# Altium PCB project_buran_a01.PcbDoc
Units mm, origin at the board's own origin, x right, y up, seen from the top; angles counter-clockwise.
Board outline 100 x 50 mm, 2 copper layers (Top Layer, Bottom Layer); 22 components, 30 nets, 131 pads, 0 vias.
Unrouted connection lines stored in the file: 70.
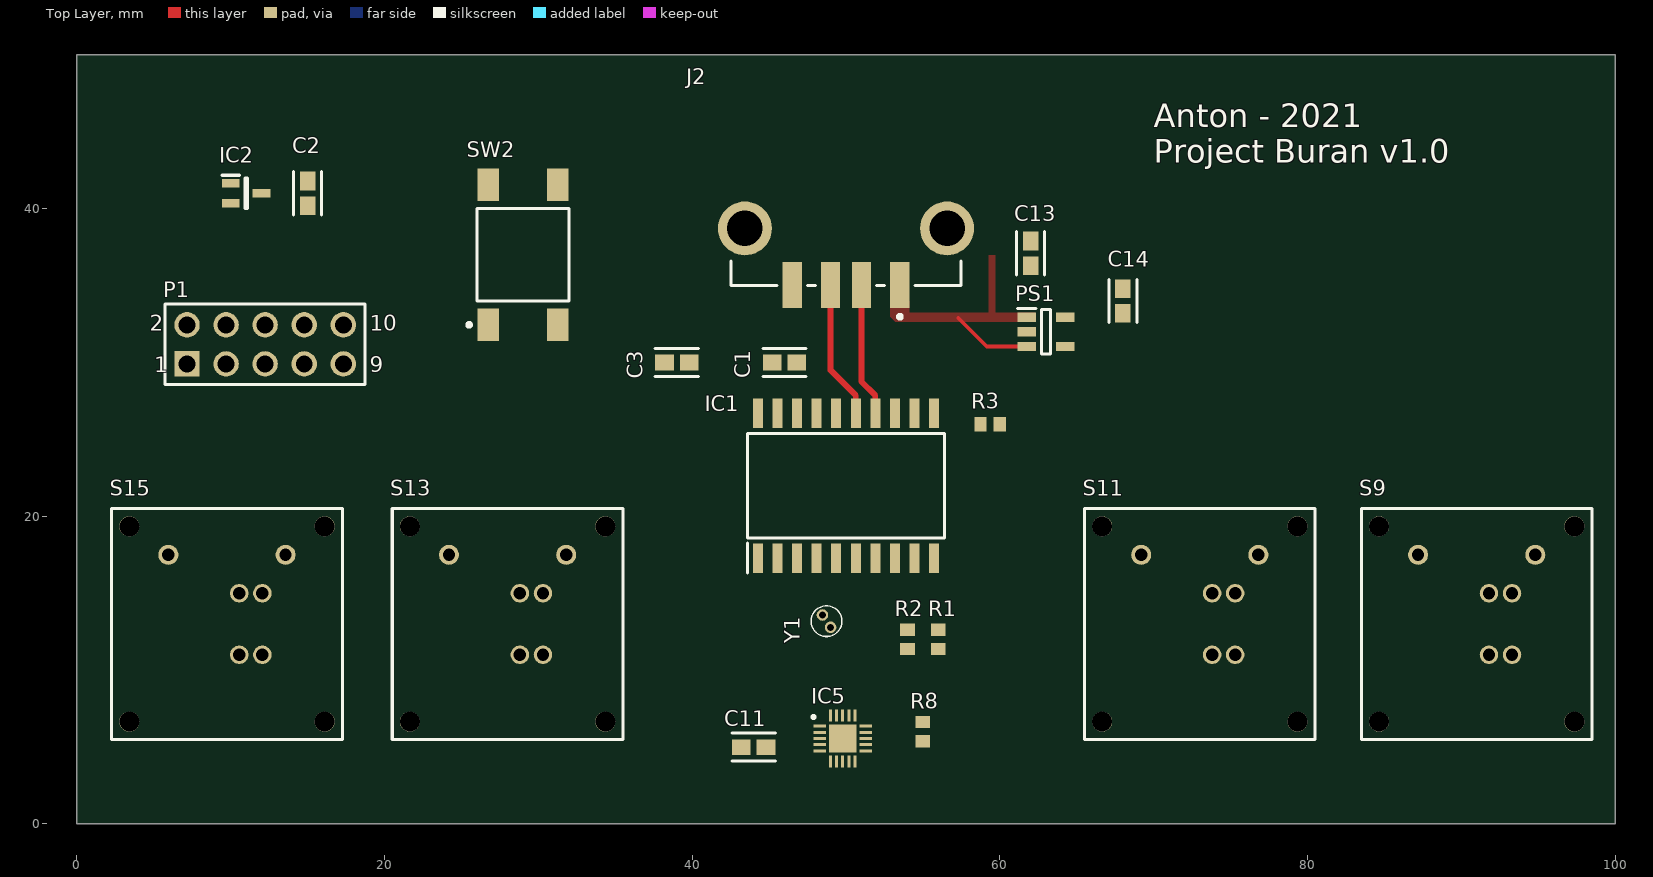
[diagram p0: Top Layer view]
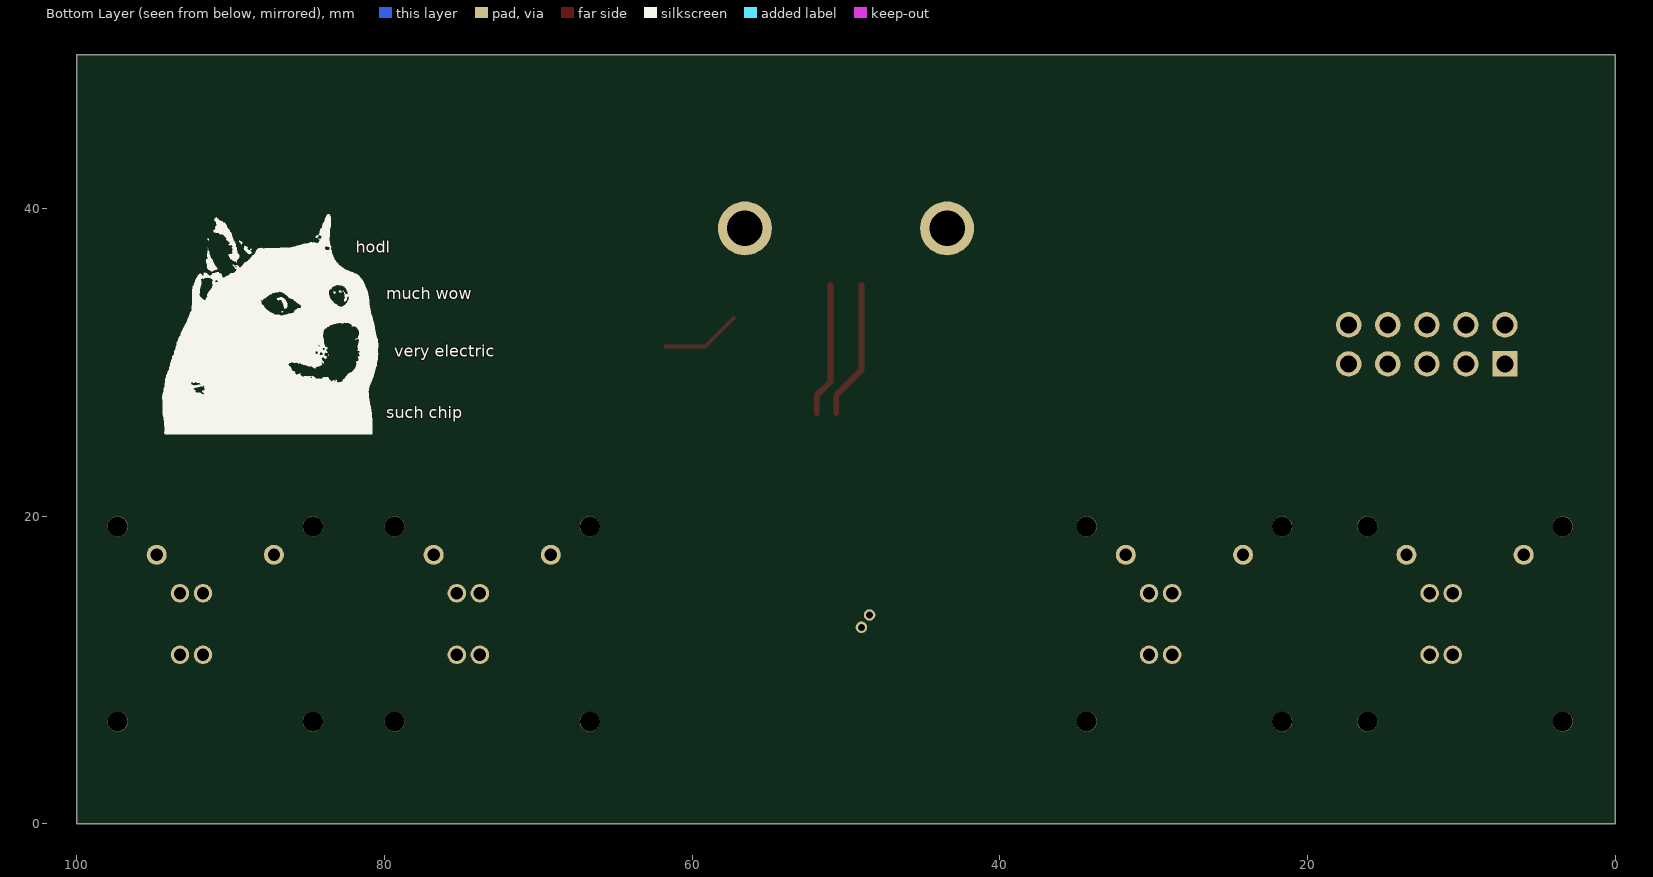
[diagram p1: Bottom Layer view, seen from below]

## Layer stack, top to bottom
Top Solder: solder mask 0.0102, Solder Resist, Dk 3.5
Top Layer: signal copper 0.0356
Dielectric 1: dielectric 0.32, FR-4, Dk 4.8
Bottom Layer: signal copper 0.0356
Bottom Solder: solder mask 0.0102, Solder Resist, Dk 3.5

## Board outline
0,0 100,0 100,50 0,50

## Design rules (kind name [scope] priority, off if disabled: settings)
Clearance [All] p1: gap=0.254 ignorepadtopadclearanceinfootprint=FALSE except(0: Arc-Hole Track-Hole SMDPad-Hole THPad-Hole Via-Hole Fill-Hole Poly-Hole Region-Hole Text-Hole)
DiffPairsRouting [All] p1: maxlimit=0.254 minlimit=0.254 mostfreqgap=0.254 toplayer_minwidth=0.381 toplayer_maxwidth=0.381 toplayer_prefwidth=0.381 bottomlayer_minwidth=0.381 bottomlayer_maxwidth=0.381 bottomlayer_prefwidth=0.381 maxuncoupledlength=12.7
PolygonConnect [All] p1: connectstyle=Direct reliefconductorwidth=0.254 reliefentries=4 polygonreliefangle="90 Angle" airgapwidth=0.254
RoutingVias [All] p1: holewidth=0.711 width=1.27 viastyle="Through Hole" minholewidth=0.711 minwidth=1.27 maxholewidth=0.711 maxwidth=1.27
SolderMaskExpansion [All] p1: expansion=0.102 istentingtop=FALSE
Width [All] p1: maxlimit=0.254 minlimit=0.254 preferedwidth=0.254
29 further rules are at their usual default settings.

## Classes and differential pairs
differential pair D: +D_P -D_N

## Components (designator, comment, footprint, x,y, rotation, side; value= is the part's Value field where it differs from the comment)
C1 "GRM188R60J106ME47D" FP-GRM188-0_1-e0_2_0_55-IPC_A 46,30 r0 top
C2 "GRM188R60J106ME47D" FP-GRM188-0_1-e0_2_0_55-IPC_A 15,41 r90 top
C3 "GRM188R60J106ME47D" FP-GRM188-0_1-e0_2_0_55-IPC_A 39,30 r180 top
C11 "GRM188R60J106ME47D" FP-GRM188-0_1-e0_2_0_55-IPC_A 44,5 r180 top
C13 "GRM188R60J106ME47D" FP-GRM188-0_1-e0_2_0_55-IPC_A 62,37.1 r90 top
C14 "GRM188R60J106ME47D" FP-GRM188-0_1-e0_2_0_55-IPC_A 68,34 r90 top
IC1 "ATSAMD11D14A-SSUT" SOIC127P1032X265-20N 50,22 r90 top
IC2 "MAX803SQ308T1G" SOT65P220X100-3N 11,41 r0 top
IC5 "LP5012RUKR" QFN40P300X300X80-21N-D 49.786,5.558 r0 top
J2 "292303-7" FP-292303-7-MFG 50,42 r270 top
P1 "61301021121" 61301021121 12.239,31.182 r0 top
PS1 "TLV75733PDBVR" SOT95P280X145-5N 63,32 r0 top
R1 "CRCW0603110RFKEA" RESC1609X50X30NL10T20 56,12 r270 top
R2 "CRCW0603110RFKEA" RESC1609X50X30NL10T20 54,12 r270 top
R3 "CRCW0603110RFKEA" RESC1609X50X30NL10T20 59.375,26 r0 top
R8 "CRCW0603110RFKEA" RESC1609X50X30NL10T20 55,6 r90 top
S9 "465M111172501" 465M111172501 91,13 r0 top
S11 "465M111172501" 465M111172501 73,13 r0 top
S13 "465M111172501" 465M111172501 28,13 r0 top
S15 "465M111172501" 465M111172501 9.756,13 r0 top
SW2 "FSM4JSMA" TECO-FSM4JSMA_V 29,37 r180 top
Y1 "AB15T-32.768KHZ" AB15T32768KHZ 48.998,12.787 r180 top

## Footprints (in the part's own frame and the unit in brackets; to place one, negate y for a bottom-side part, rotate by r counter-clockwise, add the part's x,y. Pads: shape width x height; smd on the part's side, far side on the other; paste and mask are expansions set on the pad)
465M111172501 [mm] "15x15mm THT Push Button Switch with integrated LED RGB"
  round 1.3 hole 0.8: 1(-3.81,4.5) 2(3.81,4.5)
  round 1.2 hole 0.8: L1(0.8,-2) L2(2.3,-2) L3(2.3,2) LC(0.8,2)
  round 1.3 hole 1.3 unplated: MH1(-6.35,-6.35) MH2(-6.35,6.35) MH3(6.35,6.35) MH4(6.35,-6.35)
  silkscreen extent -7.5,-7.5 7.5,7.5, body extent -7.5,-7.5 7.5,7.5, height 19.55
61301021121 [mm] "Pin Header, pitch 2.54 mm, THT, Vertical, dual row, 10p"
  rect 1.65x1.65 hole 1.1: 1(-5.08,-1.27)
  round 1.65 hole 1.1: 2(-5.08,1.27) 3(-2.54,-1.27) 4(-2.54,1.27) 5(0,-1.27) 6(0,1.27) 7(2.54,-1.27) 8(2.54,1.27) 9(5.08,-1.27) 10(5.08,1.27)
  silkscreen extent -6.5,-2.62 6.5,2.62, body extent -6.35,-2.54 6.35,2.54, height 8.59
AB15T32768KHZ [mm]
  round 0.75 hole 0.45: 1(0,0) 2(0.53,-0.8)
  silkscreen extent -0.73,-1.4 1.27,0.6, body extent -0.49,-1.15 1.01,0.35, height 5.2
FP-292303-7-MFG [mm]
  rect 3x1.25 smd paste+0 mask+0: 1(6.96,3.5) 2(6.96,1) 3(6.96,-1) 4(6.96,-3.5)
  round 3.5 hole 2.3 paste-1000 mask+0: 5(3.28,6.57) 6(3.28,-6.57)
  silkscreen extent 5.4,-7.47 9.15,7.47, body extent -7.1,-8.42 8.56,8.42, height 0.25
FP-GRM188-0_1-e0_2_0_55-IPC_A [mm]
  rect 1.208x1.012 smd paste+0 mask+0: 1(-0.802,0) 2(0.802,0)
  silkscreen extent -1.41,-0.91 1.41,0.91, body extent -1.91,-1.01 1.91,1.01, height 0.25
QFN40P300X300X80-21N-D [mm]
  rect 0.8x0.2 smd: 1(-1.5,0.8) 2(-1.5,0.4) 3(-1.5,0) 4(-1.5,-0.4) 5(-1.5,-0.8) 11(1.5,-0.8) 12(1.5,-0.4) 13(1.5,0) 14(1.5,0.4) 15(1.5,0.8)
  rect 0.2x0.8 smd: 6(-0.8,-1.5) 7(-0.4,-1.5) 8(0,-1.5) 9(0.4,-1.5) 10(0.8,-1.5) 16(0.8,1.5) 17(0.4,1.5) 18(0,1.5) 19(-0.4,1.5) 20(-0.8,1.5)
  rect 1.8x1.8 smd: 21(0,0)
  silkscreen extent -2,1.3 -1.8,1.5, body extent -1.55,-1.55 1.55,1.55, height 0.8
RESC1609X50X30NL10T20 [mm] "Chip Resistor, 2-Leads, Body 1.55x0.85mm, IPC Medium Density"
  rect 0.8x0.95 smd: 1(-0.625,0) 2(0.625,0)
  body extent -0.82,-0.48 0.82,0.48, height 0.5
SOIC127P1032X265-20N [mm]
  rect 1.925x0.65 smd: 1(-4.712,5.715) 2(-4.712,4.445) 3(-4.712,3.175) 4(-4.712,1.905) 5(-4.712,0.635) 6(-4.712,-0.635) 7(-4.712,-1.905) 8(-4.712,-3.175) 9(-4.712,-4.445) 10(-4.712,-5.715) 11(4.712,-5.715) 12(4.712,-4.445) 13(4.712,-3.175) 14(4.712,-1.905) 15(4.712,-0.635) 16(4.712,0.635) 17(4.712,1.905) 18(4.712,3.175) 19(4.712,4.445) 20(4.712,5.715)
  silkscreen extent -5.68,-6.4 3.4,6.4, body extent -5.16,-6.4 5.16,6.4, height 2.65
SOT65P220X100-3N [mm]
  rect 1.15x0.55 smd: 1(-1,0.65) 2(-1,-0.65) 3(1,0)
  silkscreen extent -1.58,-1 0.08,1.17, body extent -1.1,-1 1.1,1, height 1
SOT95P280X145-5N [mm]
  rect 1.2x0.6 smd: 1(-1.25,0.95) 2(-1.25,0) 3(-1.25,-0.95) 4(1.25,-0.95) 5(1.25,0.95)
  silkscreen extent -1.85,-1.45 0.3,1.5, body extent -1.4,-1.45 1.4,1.45, height 1.45
TECO-FSM4JSMA_V [mm] "SMD, 4-Leads, Body 6x6mm, Pitch 4.5mm"
  rect 1.4x2.1 smd: 1(2.25,4.55) 2(2.25,-4.55) 3(-2.25,4.55) 4(-2.25,-4.55)
  silkscreen extent -3,-3 3.62,4.67, body extent -3,-5 3,5, height 5.08

## Part data
C1 C2 C3 C11 C13 C14: library part CMP-2006-02792-2, "Chip Multilayer Ceramic Capacitors for General Purpose, 0603, 10uF, X5R, 15%, 20%, 6.3V", Capacitance=10uF, Case Code (Imperial)=0603, Case Code (Metric)=1608, Dielectric=X5R, Max Operating Temperature=85°C, Min Operating Temperature=-55°C, Package Quantity=4000, Tolerance=20%, Voltage=6.3V, Case/Package=0603, Depth=0.8mm, Height=0.8mm, Lead Free="Lead Free", Length=1.6mm, Material=Ceramic, Mount="Surface Mount", Packaging="Tape and Reel", Radiation Hardening=No, REACH SVHC="No SVHC", Termination=SMD/SMT, Thickness=0.035inch, Voltage Rating=6.3V, Voltage Rating (DC)=6.3V, Width=0.031inch
IC1: "Integrated Circuit", Manufacturer_Name=Microchip, Mouser Part Number=556-ATSAMD11D14ASSUT, Arrow Part Number=ATSAMD11D14A-SSUT, Arrow Price/Stock=https://www.arrow.com/en/products/atsamd11d14a-ssut/microchip-technology, Datasheet Link=http://ww1.microchip.com/downloads/en/devicedoc/atmel-42363-sam-d11_datasheet.pdf, Height=2.65mm, Manufacturer_Part_Number=ATSAMD11D14A-SSUT, Mouser Price/Stock=https://www.mouser.co.uk/ProductDetail/Microchip-Technology-Atmel/ATSAMD11D14A-SSUT/?qs=lrqjml%252Bjt8f8EFewxXrzCw%3D%3D
IC2: "Integrated Circuit", Manufacturer_Name="ON Semiconductor", Mouser Part Number=863-MAX803SQ308T1G, Arrow Part Number=MAX803SQ308T1G, Arrow Price/Stock=https://www.arrow.com/en/products/max803sq308t1g/on-semiconductor, Datasheet Link=http://www.onsemi.com/pub/Collateral/MAX803-D.PDF, Height=1mm, Manufacturer_Part_Number=MAX803SQ308T1G, Mouser Price/Stock=https://www.mouser.co.uk/ProductDetail/ON-Semiconductor/MAX803SQ308T1G?qs=aSUclzrs14xj4ys5ck7Tew%3D%3D
IC5: "Integrated Circuit", Manufacturer_Name="Texas Instruments", Mouser Part Number=595-LP5012RUKR, Arrow Part Number=LP5012RUKR, Arrow Price/Stock=https://www.arrow.com/en/products/lp5012rukr/texas-instruments, Datasheet Link=http://www.ti.com/lit/gpn/LP5012, Height=0.8mm, Manufacturer_Part_Number=LP5012RUKR, Mouser Price/Stock=https://www.mouser.co.uk/ProductDetail/Texas-Instruments/LP5012RUKR/?qs=mAH9sUMRCts7Z0PlkfxWfA%3D%3D
J2: library part CMP-03360-000008-1, "CONN RCPT USB2.0 TYPEA 4P SMD RA", Current Rating=1A, Manufacturer="TE Connectivity", Temperature="-55°C to +85°C", Temperature Range High=+85°C, Temperature Range Low=-55°C, Voltage Rating=30V, Automotive=No, Category=Conn, ComponentLink2Description=Datasheet, ComponentLink2URL=https://www.te.com/usa-en/product-292303-7.html?te_bu=Cor&te_type=other&te_campaign=oct_glo_cor-oct-global-oth-prtnr-fy19-oct-octo-buy-bom_sma-298_2&elqCampaignId=35216, Conn Orientation="Right Angle", Contact Material=Gold,Nickel, Device Class L1=Connectors, Device Class L2="USB Connectors", Device Class L3=unset, Digikey Description="CONN RCPT USB2.0 TYPEA 4P SMD RA", Is Female=yes, Lead Free=Yes, Manufacturer Part Number=292303-7, Mouser Description="USB Connectors USB A R/A Recpt Assy SMT", Number Of Contacts=4, Octopart=https://octopart.com/292303-7-te+connectivity-42840369, Package=292303-7, RoHS=TRUE, Shielding=true, Usb Standard="USB 2.0"
P1: library part CMP-1502-01084-1, "THT Vertical Pin Header WR-PHD, Pitch 2.54 mm, Dual Row, 10 pins", Contact Resistance=20mOhm, Manufacturer="Wurth Elektronik", Operating Temperature=-40to105degC, Rated Current=3A, Withstanding Voltage=500VAC, Working Voltage=250VAC, Datasheet URL=https://katalog.we-online.de/em/datasheet/6130xx21121.pdf, Gender=Male, Manufacturer URL=http://www.we-online.de, Mounting Technology=THT, Orientation=Vertical, Package Reference=61301021121, Packaging=Bag, Part Number=61301021121, Pin Number=10, Pitch=2.54mm, Publisher=WurthElektronik, Row Number=Dual
PS1: "Power Supply", Manufacturer_Name="Texas Instruments", Mouser Part Number=595-TLV75733PDBVR, Arrow Part Number=TLV75733PDBVR, Arrow Price/Stock=https://www.arrow.com/en/products/tlv75733pdbvr/texas-instruments, Datasheet Link=http://www.ti.com/lit/gpn/tlv757p, Height=1.45mm, Manufacturer_Part_Number=TLV75733PDBVR, Mouser Price/Stock=https://www.mouser.co.uk/ProductDetail/Texas-Instruments/TLV75733PDBVR/?qs=y6ZabgHbY%252BwAAzSntTW34w%3D%3D
R1 R2 R3 R8: library part CMP-2000-03854-1, Manufacturer="Vishay Dale", Part Number=CRCW0603110RFKEA
S9 S11 S13 S15: "WS-PBTL Illuminated THT Push Button Switch, Red & Green & Blue", Emitting Color="Red & Green & Blue", Operating Temperature="-40 to +85degC", Rated Current=100mA, Rated Voltage=12VDC, ComponentLink1Description=Manufacturer, ComponentLink1URL=http://www.we-online.de, ComponentLink2Description=Datasheet, ComponentLink2URL=https://katalog.we-online.com/em/datasheet/465M111172501.pdf, Contact Material="Copper Alloy", Contact Plating=Gold, Mounting Technology=THT, Operation Force=200gf, Packaging="ESD Tray", Part Number=465M111172501, Published Date="September 2019", Publisher="Wurth Elektronik", Size=15x15mm, Terminal Material="Copper Alloy", Terminal Plating=Tin
SW2: library part CMP-2000-05602-2, "Swicth, SPST, 24 V, -35 to 85 degC, 4-Pin SMD, RoHS, Tape and Reel", Case\/Package=SMD/SMT, Contact Current Rating=50mA, Contact Resistance=100mOhm, Manufacturer="TE Connectivity", Max Operating Temperature=85degC, Max Voltage Rating (DC)=12V, Min Operating Temperature=-35degC, Operating Force=1.57N, Package Description="4-Pin Surface Mount Device, Body 6 x 6 mm, Pitch 4.5 mm", Package Quantity=750, Voltage Rating=24V, Actuator Length=0.055inch, Actuator Material=Polyamide, Contact Material=CopperAlloy, Contact Plating=Silver, Current Rating=50mA, Datasheet URL=http://www.te.com/commerce/DocumentDelivery/DDEController?Action=showdoc&DocId=Customer+Drawing%7F2-1437565-7%7FV%7Fpdf%7FEnglish%7FENG_CD_2-1437565-7_V.pdf%7F4-1437565-2, Datasheet Version="Rev. V, 02/2015", Electrical Life=100000Cycles, Illumination Type=Illuminated, Length=6mm, Manufacturer URL=http://www.te.com/, Mechanical Life=100000Cycles, Mount=SurfaceMount, Mounting Technology=SurfaceMount, Orientation=Straight, Package Reference=FSM4JSMA, Packaging=LoosePiece, REACH SVHC=Unknown, RoHSCompliant=true, Switch Travel=0.25mm, Termination=GullWing, Throw Configuration=SPST, Voltage Rating (DC)=24V, Width=6mm
Y1: "Crystal or Oscillator", Manufacturer_Name=ABRACON, Mouser Part Number=815-AB15T-32.768KHZ, Arrow Part Number=AB15T-32.768KHZ, Arrow Price/Stock=https://www.arrow.com/en/products/ab15t-32.768khz/abracon, Datasheet Link=https://abracon.com/Resonators/AB15T.pdf, Height=5.1mm, Manufacturer_Part_Number=AB15T-32.768KHZ, Mouser Price/Stock=https://www.mouser.co.uk/ProductDetail/ABRACON/AB15T-32768KHZ?qs=A7YjigRBFZlcX2Ny5vfBpg%3D%3D

## Nets (pads, with @x,y where several pads share a name; then routed paths per layer and width w, separated by ;. In a path a pad name is that pad's centre, name@x,y a point inside that pad or via, vN(x,y) a via of type N, cw(c..) or ccw(c..) an arc to the next point about the centre after c; other vN are vias at no path point)
/RESET: IC1.11 IC2.2 P1.10 R3.1 SW2.1
D_N: IC1.14 J2.2 | length 8.7
  Top Layer w0.381: J2.2 51,28.77 51.905,27.865 IC1.14
D_P: IC1.15 J2.3 | length 9
  Top Layer w0.381: J2.3 49,29.5 50.635,27.865 IC1.15
GND: C1.2 C2.2 C3.2 C11.2 C13.2 C14.2 IC1.16 IC2.1 IC5.14 IC5.15 IC5.21 J2.4 J2.5 J2.6 P1.3 P1.5 PS1.2 R8.1 S9.2 S11.2 S13.2 S15.2 SW2.3 SW2.4
NetC11_1: C11.1 IC5.1
NetIC5_20: IC5.20 R8.2
OUT0: IC5.2 S9.L1
OUT1: IC5.3 S9.L2
OUT2: IC5.4 S9.L3
OUT3: IC5.5 S11.L1
OUT4: IC5.6 S11.L2
OUT5: IC5.7 S11.L3
OUT6: IC5.8 S13.L1
OUT7: IC5.9 S13.L2
OUT8: IC5.10 S13.L3
OUT9: IC5.11 S15.L1
OUT10: IC5.12 S15.L2
OUT11: IC5.13 S15.L3
SCL: IC1.7 IC5.18 R2.1
SDA: IC1.6 IC5.17 R1.1
SW0: IC1.1 S9.1
SW1: IC1.2 S11.1
SW2: IC1.3 S13.1
SW3: IC1.8 S15.1
SWCLK: IC1.12 P1.4
SWDIO: IC1.13 P1.2
V_UNREG: C13.1 J2.1 PS1.1 PS1.3 | length 5.2
  Top Layer w0.254: 57.3,32.9 59.15,31.05 PS1.3
VCC: C1.1 C2.1 C3.1 C14.1 IC1.17 IC2.3 IC5.16 IC5.19 P1.1 PS1.5 R1.2 R2.2 R3.2 S9.LC S11.LC S13.LC S15.LC
XIN32: IC1.4 Y1.2
XOUT32: IC1.5 Y1.1
pads on no net: IC1.9 IC1.10 IC1.18 IC1.19 IC1.20 P1.6 P1.7 P1.8 P1.9 PS1.4 S9.MH1 S9.MH2 S9.MH3 S9.MH4 S11.MH1 S11.MH2 S11.MH3 S11.MH4 S13.MH1 S13.MH2 S13.MH3 S13.MH4 S15.MH1 S15.MH2 S15.MH3 S15.MH4 SW2.2

## Polygon pours and split planes (outlines as drawn)
V_UNREG on Top Layer "V_UNREG_L01_P003" (solid, pour order 3): 59.276,33.25 59.7,33.248 59.7,36.959 59.276,36.959
V_UNREG on Top Layer "V_UNREG_L01_P001" (solid, pour order 1): 52.876,32.986 52.876,33.25 62.349,33.25 62.349,32.649 53.209,32.652
V_UNREG on Top Layer "V_UNREG_L01_P000" (solid, pour order 0): 52.873,34 54.123,33.997 54.123,32.652 53.209,32.652 52.876,32.986

## Silkscreen, mask and mechanical layers (free items; w line width, h text height)
Top Overlay:
  text "Anton - 2021 / Project Buran v1.0" at 70,43 h1.52
Bottom Overlay:
  drawing of 16 lines, arcs and shapes, not listed
  text "hodl" at 81.873,37.127 h0.76
  text "much wow" at 79.873,34.127 h0.76
  text "very electric" at 79.373,30.381 h0.76
  text "such chip" at 79.873,26.381 h0.76

## Text inside footprints (layer, text, board x,y; h text height)
P1: Top Overlay "2" at 4.729,32.082 h1.02; Top Overlay "1" at 5.029,29.382 h1.02; Top Overlay "9" at 19.049,29.382 h1.02; Top Overlay "10" at 19.049,32.082 h1.02